# Altium PCB StationRecharge.PcbDoc
Units mm, origin at the board's own origin, x right, y up, seen from the top; angles counter-clockwise.
Board outline 50 x 40 mm, 2 copper layers (Top Layer, Bottom Layer); 17 components, 14 nets, 57 pads, 0 vias.
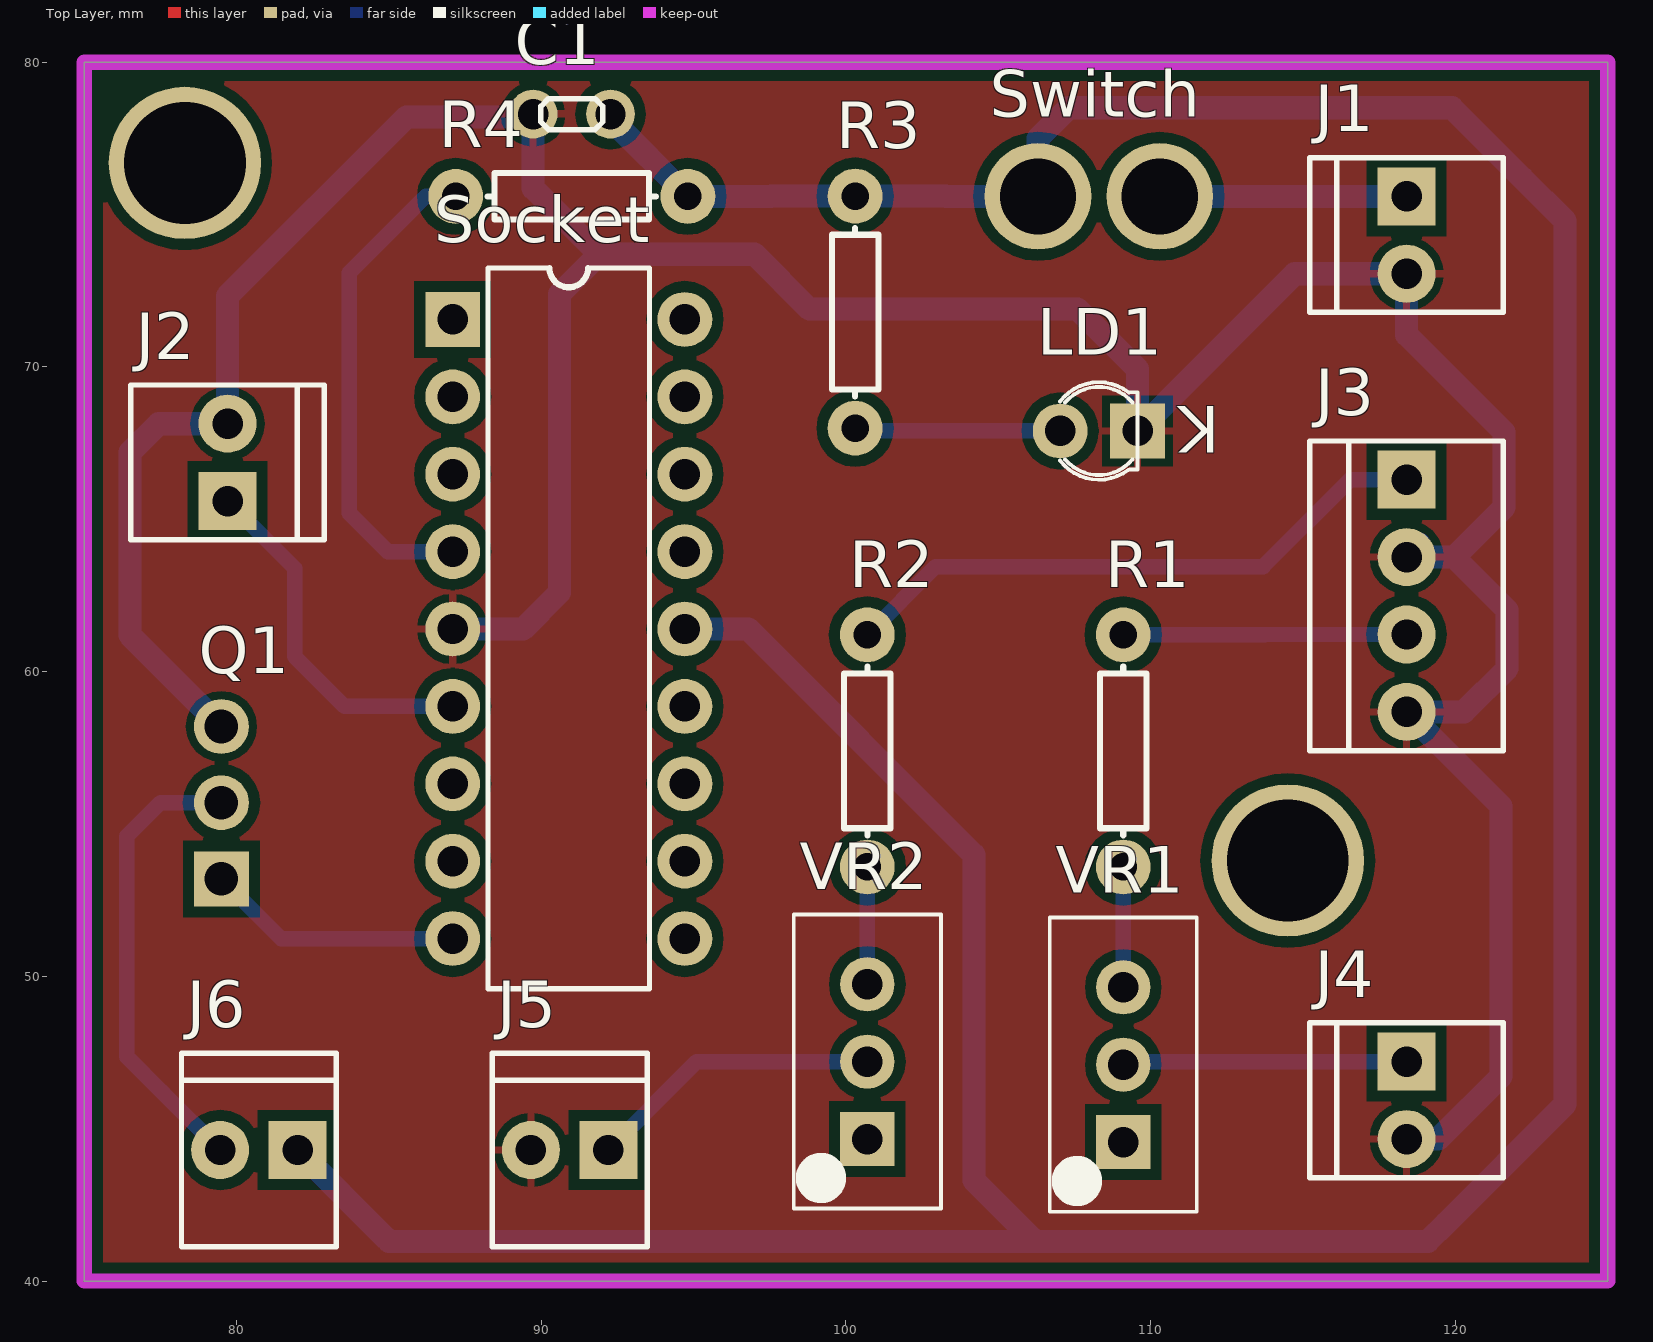
[diagram p0: Top Layer view]
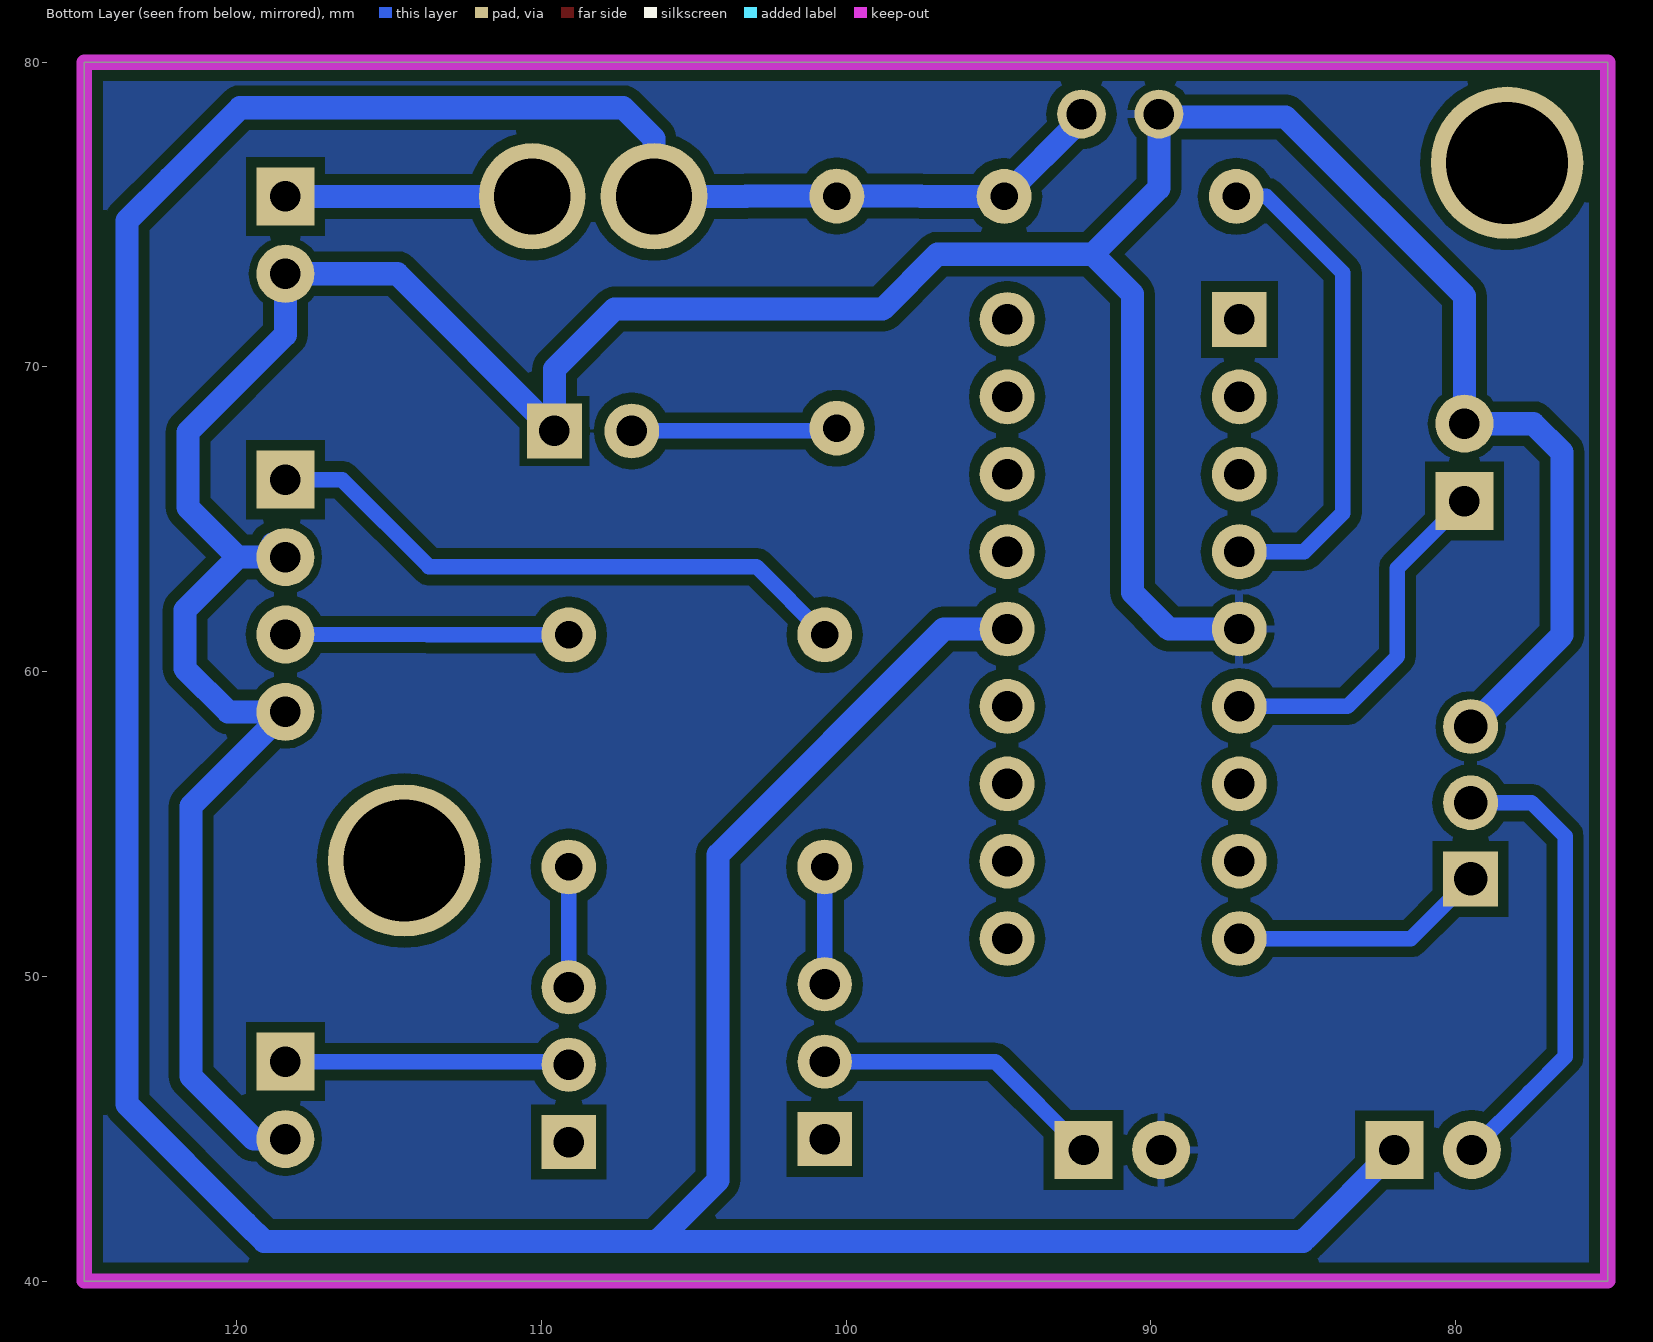
[diagram p1: Bottom Layer view, seen from below]

## Layer stack, top to bottom
Top Solder: solder mask 0.0102, Solder Resist, Dk 3.5
Top Layer: signal copper 0.0356
Dielectric 1: dielectric 0.32, FR-4, Dk 4.8
Bottom Layer: signal copper 0.0356
Bottom Solder: solder mask 0.0102, Solder Resist, Dk 3.5

## Board outline
75,40 125,40 125,80 75,80

## Design rules (kind name [scope] priority, off if disabled: settings)
Clearance [All] p1: gap=0.356
ComponentClearance [All] p1 off: gap=0.254 collisioncheckmode=3 verticalgap=0.254 showdistances=FALSE
PolygonConnect [All] p1: connectstyle=Relief reliefconductorwidth=0.254 reliefentries=4 polygonreliefangle="90 Angle" airgapwidth=0.254
RoomDefinition StationRecharge [InComponentClass('StationRecharge')] p1: confinementstyle=ConfineIn formatcopy=TRUE lockcomponents=FALSE outline 126.2,41.5 236.4,41.5 236.4,68.3 126.2,68.3
RoutingLayers [All] p1: top layer_v5=FALSE bottom layer_v5=TRUE
RoutingVias [All] p1: holewidth=0.711 width=1.27 viastyle="Through Hole" minholewidth=0.711 minwidth=1.27 maxholewidth=0.711 maxwidth=1.27
SolderMaskExpansion [All] p1: expansion=0.102
Width [All] p1: maxlimit=0.762 minlimit=0.762 preferedwidth=0.762
28 further rules are at their usual default settings.

## Components (designator, comment, footprint, x,y, rotation, side; value= is the part's Value field where it differs from the comment)
C1 "Cap Ceramic" "CER RAD-0.1" 91,78.3 r0 top
J1 "Input" MTA100-2 118.4,75.6 r180 top
J2 "Input" MTA100-2 79.7,65.6 r0 top
J3 "MTA100-4" "MTA100-4 MF" 118.4,66.3 r180 top
J4 "Input" MTA100-2 118.4,47.2 r180 top
J5 "Input" MTA100-2 92.2,44.3 r90 top
J6 "Input" MTA100-2 82,44.3 r90 top
LD1 "Power Good" "LED 3mm Vertical" 108.3,67.9 r90 top
Q1 "Component_1" PCBComponent_1#1 79.5,55.7 r0 top
R1 "Res1" AXIAL-0.3 109.1,57.4 r90 top
R2 "Res1" AXIAL-0.3 100.7,57.4 r90 top
R3 "Res1" AXIAL-0.3 100.3,71.8 r270 top
R4 "Res1" AXIAL-0.3 91,75.6 r0 top
Socket "Socket" DIP18 90.9,61.4 r270 top
Switch "SwitchMini" PCBComponent_1#2 106.3,75.6 r0 top
VR1 "POTMAN" VR1 109.1,47.1 r90 top
VR2 "POTCLK" VR1 100.7,47.2 r90 top

## Footprints (in the part's own frame and the unit in brackets; to place one, negate y for a bottom-side part, rotate by r counter-clockwise, add the part's x,y. Pads: shape width x height; smd on the part's side, far side on the other; paste and mask are expansions set on the pad)
AXIAL-0.3 [mm] "Axial Device, Thru-Hole; 2 Leads; 0.3 in Pin Spacing"
  round 1.8 hole 0.9: 1(-3.81,0) 2(3.81,0)
  silkscreen extent -2.77,-0.76 2.77,0.76
"CER RAD-0.1" [mm]
  round 1.6 hole 1: 1(-1.27,0) 2(1.27,0)
  silkscreen extent -1.02,-0.51 1.02,0.51, body extent -1.02,-0.51 1.02,0.51, height 1.96
DIP18 [mm] "DIP18"
  rect 1.8x1.8 hole 1: 1(-10.16,-3.81)
  round 1.8 hole 1: 2(-7.62,-3.81) 3(-5.08,-3.81) 4(-2.54,-3.81) 5(0,-3.81) 6(2.54,-3.81) 7(5.08,-3.81) 8(7.62,-3.81) 9(10.16,-3.81) 10(10.16,3.81) 11(7.62,3.81) 12(5.08,3.81) 13(2.54,3.81) 14(0,3.81) 15(-2.54,3.81) 16(-5.08,3.81) 17(-7.62,3.81) 18(-10.16,3.81)
  silkscreen extent -11.85,-2.65 11.81,2.65, body extent -11.94,-4.19 11.94,4.19, height 2.54
"LED 3mm Vertical" [mm] "LED 3mm Vertical"
  round 1.8 hole 1: 1(0,1.27)
  rect 1.8x1.8 hole 1: 2(0,-1.27)
  silkscreen extent -1.6,-1.27 1.6,1.28, body extent -1.74,-1.91 1.75,1.75, height 6.15
MTA100-2 [mm] "MTA100-2 M"
  rect 1.905x1.905 hole 1: 1(0,0)
  round 1.905 hole 1: 2(0,2.54)
  silkscreen extent -3.18,-1.27 3.17,3.81, body extent -3.18,-1.27 3.17,3.81, height 2.54
"MTA100-4 MF" [mm] "MTA100-4 MF"
  rect 1.905x1.905 hole 1.001: 1(0,0)
  round 1.905 hole 1: 2(0,2.54) 3(0,5.08) 4(0,7.62)
  silkscreen extent -3.18,-1.27 3.17,8.89, body extent -3.18,-1.27 3.17,8.89, height 15.93
PCBComponent_1#1 [mm]
  round 1.8 hole 1.1: D(0,0) S(0,2.5)
  rect 1.8x1.8 hole 1.1: G(0,-2.5)
PCBComponent_1#2 [mm]
  round 3.5 hole 2.5: 1(0,0) 2(4,0)
VR1 [mil] "Trim 10T Vertical"
  rect 70x70 hole 39.37: 1(-100,0)
  round 70 hole 39.37: 2(0,0) 3(100,0)
  silkscreen extent -190,-95 190,95, body extent -190,-95 190,95, height 478

## Part data
C1: "Capacitor"
J1 J2 J4 J5 J6: library part MTA100-2, "MTA Male 0 Degres"
J3: "MTA100-4M"
LD1: library part "LED 3mm Vertical", "Through Hole"
R1 R2 R3 R4: "Resistor"
VR1 VR2: library part "Res Pot 10T Vertical"

## Free pads (board coordinates)
  round 5 hole 4: 0(78.3,76.7) 2(114.5,53.8)

## Nets (pads, with @x,y where several pads share a name; then routed paths per layer and width w, separated by ;. In a path a pad name is that pad's centre, name@x,y a point inside that pad or via, vN(x,y) a via of type N, cw(c..) or ccw(c..) an arc to the next point about the centre after c; other vN are vias at no path point)
CLKBOB: Q1.G Socket.9 | length 8.4
  Bottom Layer w0.508: Q1.G 81.46,51.24 Socket.9
CLKMANIN: J3.1 R2.2 | length 19.8
  Bottom Layer w0.508: R2.2 102.939,63.449 113.69,63.449 116.541,66.3 J3.1
CLKMANOUT: J2.1 Socket.6 | length 11.9
  Bottom Layer w0.508: J2.1 81.9,63.4 81.9,60.5 83.54,58.86 Socket.6
GND: C1.1 J1.2 J2.2 J3.2 J3.4 J4.2 J5.2 LD1.2 Q1.S Socket.5 | length 123.4
  Bottom Layer w0.508: C1.1@89.392,78.638 C1.1 C1.1@89.73,78.204
  Bottom Layer w0.762: Q1.S 76.5,61.2 76.5,67.2 77.44,68.14 J2.2 79.7,72.334 85.57,78.204 C1.1@89.73,78.204 ; Socket.5 89.4,61.4 90.6,62.6 90.6,72.4 91.9,73.7 ; C1.1 89.73,75.87 91.9,73.7 ; J4.2 119.438,44.66 121.5,46.722 121.5,55.58 J3.4 120.28,58.68 121.7,60.1 121.7,62.02 119.96,63.76 ; J3.2@118.826,64.186 J3.2 119.96,63.76 ; 91.9,73.7 97,73.7 98.8,71.9 107.6,71.9 109.57,69.93 LD1.2 114.73,73.06 J1.2 118.4,71.059 121.6,67.859 121.6,65.4 119.96,63.76
MAN: J3.3 R1.2 | length 9.3
  Bottom Layer w0.508: R1.2 113.741,61.21 113.751,61.22 J3.3
NetJ1_1: J1.1 Switch.2 | length 8.1
  Bottom Layer w0.762: Switch.2 J1.1
NetJ4_1: J4.1 VR1.2 | length 9.4
  Bottom Layer w0.508: VR1.2 109.1,47.2 J4.1
NetJ5_1: J5.1 VR2.2 | length 9.7
  Bottom Layer w0.508: J5.1 95.1,47.2 VR2.2
NetJ6_2: J6.2 Q1.D | length 15.1
  Bottom Layer w0.508: J6.2 77.572,46.188 76.4,47.36 76.4,54.6 77.5,55.7 Q1.D
NetLD1_1: LD1.1 R3.2 | length 6.8
  Bottom Layer w0.508: R3.2 100.3,67.9 LD1.1
NetR1_1: R1.1 VR1.3 | length 4
  Bottom Layer w0.508: VR1.3 R1.1
NetR2_1: R2.1 VR2.3 | length 3.8
  Bottom Layer w0.508: VR2.3 R2.1
NetR4_1: R4.1 Socket.4 | length 16.3
  Bottom Layer w0.508: Socket.4 84.96,63.94 83.7,65.2 83.7,73.1 86.2,75.6 R4.1
VCC: C1.2 J6.1 R3.1 R4.2 Socket.14 Switch.1 | length 135.9
  Bottom Layer w0.508: C1.2@92.27,78.14 C1.2
  Bottom Layer w0.762: J6.1 84.9,41.4 ; 85,41.3 119.1,41.3 119.7,41.9 123.6,45.8 123.6,74.8 122.2,76.2 119.889,78.511 107.315,78.511 106.3,77.496 Switch.1 103.286,75.6 103.276,75.61 R3.1 97.546,75.61 97.536,75.6 R4.2 C1.2@92.27,78.14 ; Socket.14 96.791,61.4 104.2,53.991 104.2,43.3 106.1,41.4
pads on no net: Socket.1 Socket.2 Socket.3 Socket.7 Socket.8 Socket.10 Socket.11 Socket.12 Socket.13 Socket.15 Socket.16 Socket.17 Socket.18 VR1.1 VR2.1

## Polygon pours and split planes (outlines as drawn)
GND on Top Layer "Top Layer-No Net" (solid, shelved, pour order 10): 75,80 75,40 125,40 125,80
GND on Top Layer "Top Layer-No Net" (solid, shelved, pour order 6): 75,80 75,40 125,40 125,80
GND on Top Layer "Top Layer-No Net" (solid, pour order 15): 75,80 75,40 125,40 125,80
GND on Bottom Layer "Top Layer-No Net" (solid, shelved, pour order 9): 75,80 75,40 125,40 125,80
GND on Bottom Layer "Top Layer-No Net" (solid, shelved, pour order 7): 75,80 75,40 125,40 125,80
GND on Bottom Layer "Top Layer-No Net" (solid, shelved, pour order 8): 75,80 75,40 125,40 125,80
GND on Bottom Layer "Top Layer-No Net" (solid, pour order 13): 75,80 75,40 125,40 125,80

## Keep-outs
Keep-Out Layer:
  the board outline again, w0.5

## Silkscreen, mask and mechanical layers (free items; w line width, h text height)
Mechanical 1:
  text "Alim" at 115.9,77.7 h1.52
  text "CLKMAN" at 76.2,72 h1.52
  text "OUT" at 76.2,69.9 h1.52
  text "TO Board" at 114.2,56.9 h1.52 r90
  text "MAN" at 116.1,49.5 h1.52
  text "Bobine" at 76.8,48.3 h1.52
  text "CLK" at 94.2,46.4 h1.52 r270

## Text inside footprints (layer, text, board x,y; h text height)
LD1: Top Overlay "K" at 112.262,68.713 h1.52 r180